# EAGLE board steering_wheel_V3.0 (EAGLE 6.3)
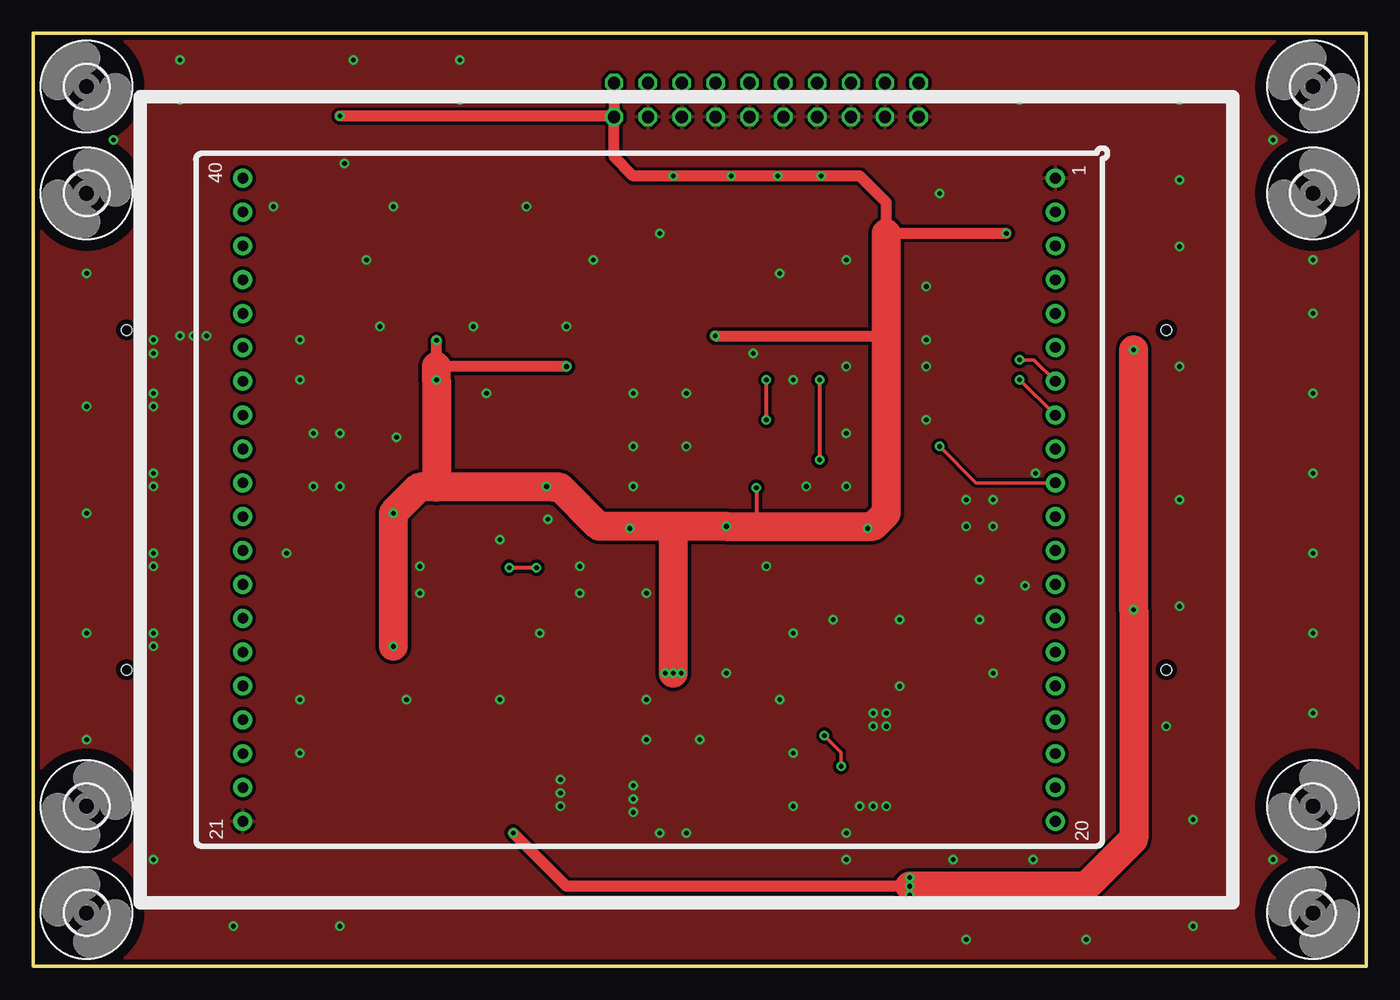
[diagram p0: board, top side]
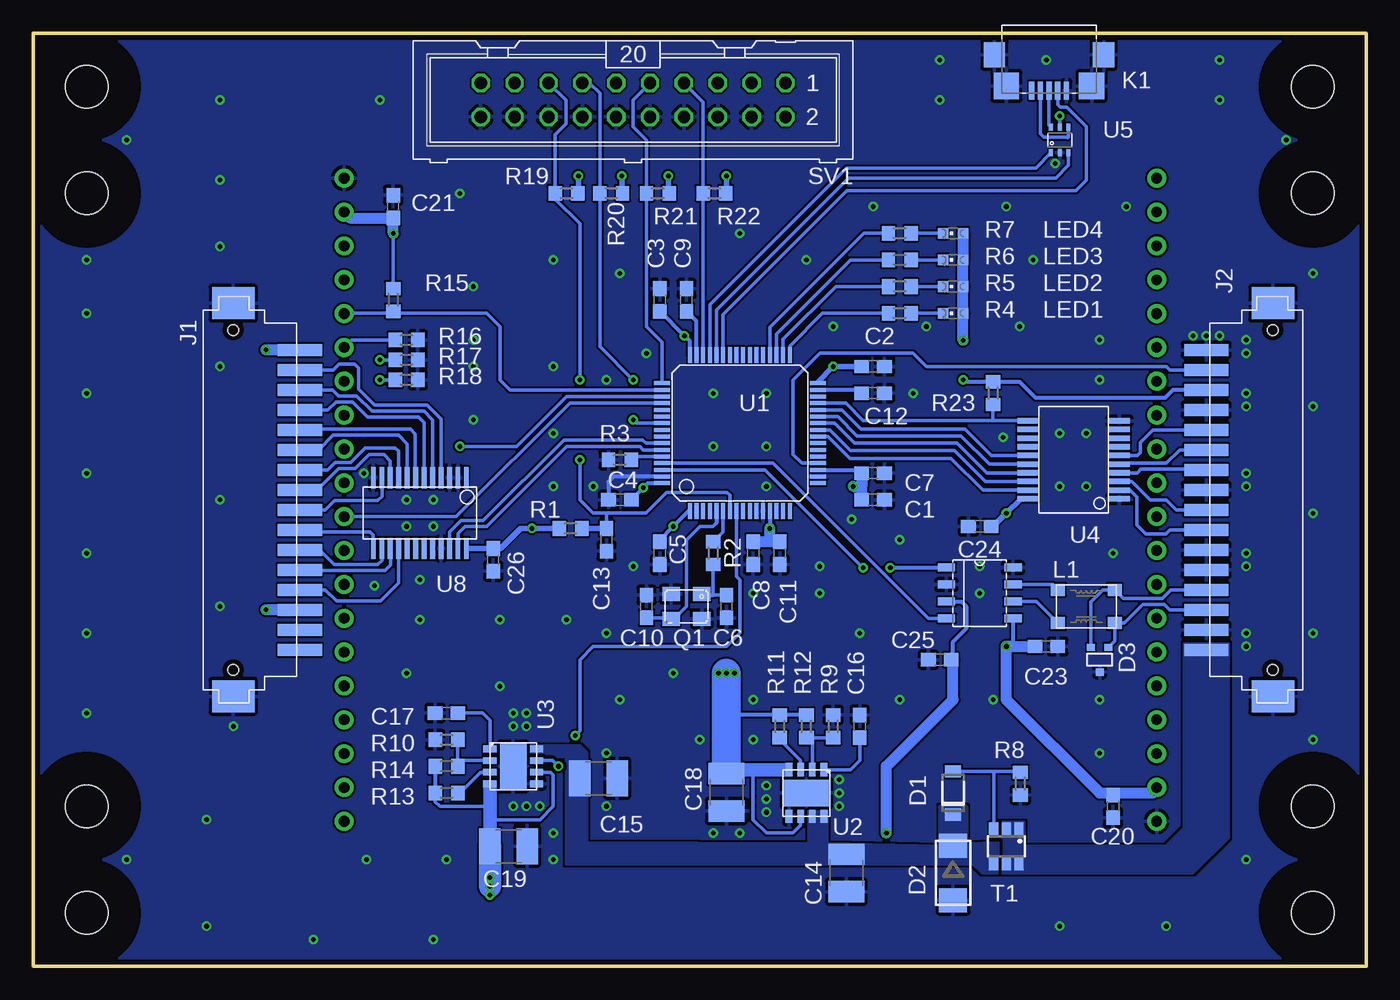
[diagram p1: board, bottom side, seen from below]

Size 100 x 70 mm. Coordinates in mm from the lower left corner, seen from the top.
Outline: 0,70 0,0 100,0 100,70 0,70
Copper layers (1*16): Top 0.0356mm / dielectric 1.5011mm / Bottom 0.0356mm
Design rules "oshPark2Layer *": minimum track width 6mil, minimum drill 13mil, track to track 6mil, track to pad 6mil, pad to pad 6mil, via to via 6mil, smd to smd 6mil, copper to edge 15mil, drill to drill 6mil, minimum pad ring 7mil, minimum via ring 7mil, stop-mask expansion 3mil, vias tented up to drill 0.35mm, thermal gap 10mil
tKeepout: area 9,6 to 89,64

## Footprints (pad centres in the part's own frame; a part is rotated, then mirrored left to right if it is on the bottom)
C0603 = smd 1.1 x 1: 1 -0.85,0; 2 0.85,0
C1210 = smd 1.6 x 2.7: 1 -1.4,0; 2 1.4,0
SOD123F = smd 0.91 x 1.22: A 1.625,0; C -1.625,0
DO214AC = smd 1.8 x 2.1: A 2.05,0; C -2.05,0
SOT-323 = smd 0.6 x 0.55: 1 -0.65,-0.925; 2 0.65,-0.925; 3 0,0.925
EDIPTFT32-A = drill 0.8 pad 1.422: P$1 -24.13,30.48; P$2 -21.59,30.48; P$3 -19.05,30.48; P$4 -16.51,30.48; P$5 -13.97,30.48; P$6 -11.43,30.48; P$7 -8.89,30.48; P$8 -6.35,30.48; P$9 -3.81,30.48; P$10 -1.27,30.48; P$11 1.27,30.48; P$12 3.81,30.48; P$13 6.35,30.48; P$14 8.89,30.48; P$15 11.43,30.48; P$16 13.97,30.48; P$17 16.51,30.48; P$18 19.05,30.48; P$19 21.59,30.48; P$20 24.13,30.48; P$21 24.13,-30.48; P$22 21.59,-30.48; P$23 19.05,-30.48; P$24 16.51,-30.48; P$25 13.97,-30.48; P$26 11.43,-30.48; P$27 8.89,-30.48; P$28 6.35,-30.48; P$29 3.81,-30.48; P$30 1.27,-30.48; P$31 -1.27,-30.48; P$32 -3.81,-30.48; P$33 -6.35,-30.48; P$34 -8.89,-30.48; P$35 -11.43,-30.48; P$36 -13.97,-30.48; P$37 -16.51,-30.48; P$38 -19.05,-30.48; P$39 -21.59,-30.48; P$40 -24.13,-30.48
3,2 = hole 3.2: 0,0
1-292227-6 = smd 0.9 x 3.3: 1 -11.25,5; 2 -9.75,5; 3 -8.25,5; 4 -6.75,5; 5 -5.25,5; 6 -3.75,5; 7 -2.25,5; 8 -0.75,5; 9 0.75,5; 10 2.25,5; 11 3.75,5; 12 5.25,5; 13 6.75,5; 14 8.25,5; 15 9.75,5; 16 11.25,5 | smd 2.4 x 3.2: PAD1 -14.75,0; PAD2 14.75,0 | hole 0.8: 12.75,0; -12.75,0
ZX62R-B = smd 1.35 x 0.4: D+ 2.35,0; D- 2.35,-0.65; GND 2.35,1.3; ID 2.35,0.65; VCC 2.35,-1.3 | smd 2 x 1.9: P$6 2,-3.2; P$8 2,3.2 | smd 1.9 x 1.6: P$7 -0.35,-4.1; P$9 -0.35,4.1
ACT45B = smd 1.05 x 0.9: 1 -2.125,1.25; 2 -2.125,-1.25; 3 2.125,-1.25; 4 2.125,1.25
CHIPLED_0603 = smd 0.8 x 0.8: A 0,-0.75; C 0,0.75
3.2X2.5MM-SMD = smd 1.3 x 1.05: 1 1.15,0.925; 2 -1.15,0.925; 3 -1.15,-0.925; 4 1.15,-0.925
R0603 = smd 1 x 1.1: 1 -0.85,0; 2 0.85,0
ML20 = drill 0.914 octagon: 1 -11.43,-1.27; 2 -11.43,1.27; 3 -8.89,-1.27; 4 -8.89,1.27; 5 -6.35,-1.27; 6 -6.35,1.27; 7 -3.81,-1.27; 8 -3.81,1.27; 9 -1.27,-1.27; 10 -1.27,1.27; 11 1.27,-1.27; 12 1.27,1.27; 13 3.81,-1.27; 14 3.81,1.27; 15 6.35,-1.27; 16 6.35,1.27; 17 8.89,-1.27; 18 8.89,1.27; 19 11.43,-1.27; 20 11.43,1.27
SSOT6 = smd 0.69 x 0.99: 1 -0.95,-1.3; 2 0,-1.3; 3 0.95,-1.3; 4 0.95,1.3; 5 0,1.3; 6 -0.95,1.3
LQFP64 = smd 1.2 x 0.3: 1 -5.85,3.75; 2 -5.85,3.25; 3 -5.85,2.75; 4 -5.85,2.25; 5 -5.85,1.75; 6 -5.85,1.25; 7 -5.85,0.75; 8 -5.85,0.25; 9 -5.85,-0.25; 10 -5.85,-0.75; 11 -5.85,-1.25; 12 -5.85,-1.75; 13 -5.85,-2.25; 14 -5.85,-2.75; 15 -5.85,-3.25; 16 -5.85,-3.75; 33 5.85,-3.75; 34 5.85,-3.25; 35 5.85,-2.75; 36 5.85,-2.25; 37 5.85,-1.75; 38 5.85,-1.25; 39 5.85,-0.75; 40 5.85,-0.25; 41 5.85,0.25; 42 5.85,0.75; 43 5.85,1.25; 44 5.85,1.75; 45 5.85,2.25; 46 5.85,2.75; 47 5.85,3.25; 48 5.85,3.75 | smd 0.3 x 1.2: 17 -3.75,-5.85; 18 -3.25,-5.85; 19 -2.75,-5.85; 20 -2.25,-5.85; 21 -1.75,-5.85; 22 -1.25,-5.85; 23 -0.75,-5.85; 24 -0.25,-5.85; 25 0.25,-5.85; 26 0.75,-5.85; 27 1.25,-5.85; 28 1.75,-5.85; 29 2.25,-5.85; 30 2.75,-5.85; 31 3.25,-5.85; 32 3.75,-5.85; 49 3.75,5.85; 50 3.25,5.85; 51 2.75,5.85; 52 2.25,5.85; 53 1.75,5.85; 54 1.25,5.85; 55 0.75,5.85; 56 0.25,5.85; 57 -0.25,5.85; 58 -0.75,5.85; 59 -1.25,5.85; 60 -1.75,5.85; 61 -2.25,5.85; 62 -2.75,5.85; 63 -3.25,5.85; 64 -3.75,5.85
SIL0008E = smd 1 x 0.5: 1 -1.75,1.312; 2 -1.75,0.438; 3 -1.75,-0.438; 4 -1.75,-1.312; 5 1.75,-1.312; 6 1.75,-0.438; 7 1.75,0.438; 8 1.75,1.312 | smd 2 x 3.5: PAD 0,0
SSOP-20 = smd 0.42 x 1.62: 1 -2.925,-3.425; 2 -2.275,-3.425; 3 -1.625,-3.425; 4 -0.975,-3.425; 5 -0.325,-3.425; 6 0.325,-3.425; 7 0.975,-3.425; 8 1.625,-3.425; 9 2.275,-3.425; 10 2.925,-3.425; 11 2.925,3.425; 12 2.275,3.425; 13 1.625,3.425; 14 0.975,3.425; 15 0.325,3.425; 16 -0.325,3.425; 17 -0.975,3.425; 18 -1.625,3.425; 19 -2.275,3.425; 20 -2.925,3.425
SOT363 = smd 0.3 x 0.5: 1 0.65,0.95; 2 0,0.95; 3 -0.65,0.95; 4 -0.65,-0.95; 5 0,-0.95; 6 0.65,-0.95
SOIC8 = smd 0.6 x 1.3: P1 -1.905,-2.5; P2 -0.635,-2.5; P3 0.635,-2.5; P4 1.905,-2.5; P5 1.905,2.5; P6 0.635,2.5; P7 -0.635,2.5; P8 -1.905,2.5
QSOP-24 = smd 0.36 x 1.6: 1 -3.493,-2.655; 2 -2.857,-2.655; 3 -2.223,-2.655; 4 -1.587,-2.655; 5 -0.953,-2.655; 6 -0.318,-2.655; 7 0.318,-2.655; 8 0.953,-2.655; 9 1.587,-2.655; 10 2.223,-2.655; 11 2.857,-2.655; 12 3.493,-2.655; 13 3.493,2.655; 14 2.857,2.655; 15 2.223,2.655; 16 1.587,2.655; 17 0.953,2.655; 18 0.318,2.655; 19 -0.318,2.655; 20 -0.953,2.655; 21 -1.587,2.655; 22 -2.223,2.655; 23 -2.857,2.655; 24 -3.493,2.655

## Placement (x,y rotation side)
C1  4u7  [C0603]  37,35 0 bottom
C2  100n  [C0603]  37,45 0 bottom
C3  100n  [C0603]  53,50 90 bottom
C4  100n  [C0603]  56,35 180 bottom
C5  100n  [C0603]  53,31 270 bottom
C6  10p  [C0603]  48,27 270 bottom
C7  100n  [C0603]  37,37 0 bottom
C8  1u  [C0603]  46,31 270 bottom
C9  2u2  [C0603]  51,50 90 bottom
C10  10p  [C0603]  54,27 90 bottom
C11  10n  [C0603]  44,31 270 bottom
C12  2u2  [C0603]  37,43 0 bottom
C13  100n  [C0603]  57,32 270 bottom
C14  22u  [C1210]  39,7 270 bottom
C15  22u  [C1210]  57.6,14.1 0 bottom
C16  3n3  [C0603]  38,18 90 bottom
C17  3n3  [C0603]  69,19 180 bottom
C18  22u  [C1210]  48,13.05 270 bottom
C19  22u  [C1210]  64.35,9 0 bottom
C20  100n  [C0603]  19,12 270 bottom
C21  100n  [C0603]  73,57 90 bottom
C23  100n  [C0603]  24,24 180 bottom
C24  100n  [C0603]  29,33 0 bottom
C25  100n  [C0603]  32,23 0 bottom
C26  100n  [C0603]  65.5,30.5 90 bottom
D1  BZT52B18-E3-18  [SOD123F]  31,13 90 bottom
D2  SMA6J33CA-TR  [DO214AC]  31,7 270 bottom
D3  PESD1CAN-U  [SOT-323]  20,23 180 bottom
DISPLAY  EA_EDIPTFT32-A  [EDIPTFT32-A]  46.2,35 270 top
H1  MOUNT-HOLE3.2  [3,2]  4,66 270 top
H2  MOUNT-HOLE3.2  [3,2]  4,4 270 top
H3  MOUNT-HOLE3.2  [3,2]  96,66 270 top
H4  MOUNT-HOLE3.2  [3,2]  96,4 270 top
H5  MOUNT-HOLE3.2  [3,2]  4,58 0 top
H6  MOUNT-HOLE3.2  [3,2]  4,12 0 top
H7  MOUNT-HOLE3.2  [3,2]  96,58 0 top
H8  MOUNT-HOLE3.2  [3,2]  96,12 0 top
J1  1-292227-6  [1-292227-6]  85,35 270 bottom
J2  1-292227-6  [1-292227-6]  7,35 90 bottom
K1  USB-MICROZX62R-B  [ZX62R-B]  23.8,68.05 270 bottom
L1  ACT45B  [ACT45B]  21,27 0 bottom
LED1  [CHIPLED_0603]  31,49 90 bottom
LED2  [CHIPLED_0603]  31,51 90 bottom
LED3  [CHIPLED_0603]  31,53 90 bottom
LED4  [CHIPLED_0603]  31,55 90 bottom
Q1  25 MHz  [3.2X2.5MM-SMD]  51,27 0 bottom
R1  10k  [R0603]  59.7,32.85 0 bottom
R2  390  [R0603]  49,31 270 bottom
R3  4k7  [R0603]  56,38 180 bottom
R4  470  [R0603]  35,49 0 bottom
R5  470  [R0603]  35,51 0 bottom
R6  470  [R0603]  35,53 0 bottom
R7  470  [R0603]  35,55 0 bottom
R8  10k  [R0603]  25.95,13.7 90 bottom
R9  383k  [R0603]  40,18 270 bottom
R10  44.2k  [R0603]  69,17 0 bottom
R11  10k  [R0603]  44,18 90 bottom
R12  1M21  [R0603]  42,18 90 bottom
R13  10k  [R0603]  69,13 180 bottom
R14  232k  [R0603]  69,15 180 bottom
R15  100k  [R0603]  73,50 270 bottom
R16  X(10k)  [R0603]  72,47 180 bottom
R17  X(10k)  [R0603]  72,45.5 180 bottom
R18  X(10k)  [R0603]  72,44 180 bottom
R19  x(10K)  [R0603]  60,58 180 bottom
R20  10K  [R0603]  56.65,58 180 bottom
R21  10K  [R0603]  53.15,58 180 bottom
R22  10K  [R0603]  48.9,58 180 bottom
R23  10k  [R0603]  28,43 90 bottom
SV1  [ML20]  55,65 180 bottom
T1  FDC5614P  [SSOT6]  27,9 180 bottom
U1  STM32F415RG  [LQFP64]  47,40 90 bottom
U2  LMZ21701  [SIL0008E]  42,13 270 bottom
U3  LMZ21701  [SIL0008E]  64,15 0 bottom
U4  MAX6818  [SSOP-20]  21.95,38 90 bottom
U5  NUF2221  [SOT363]  23,62 180 bottom
U6  SN65HVD256  [SOIC8]  29,28 270 bottom
U8  MAX7313AEG+  [QSOP-24]  71,34 180 bottom

## Library data of the parts
C1-C5 C7-C9 C11 C12 C14-C21 C23-C26 R4-R7 R10 R14-R18 R23 = rcl
C6 C10 C13 = rcl; DISTRIBUTOR: Digikey; OC_DIGIKEY: 445-1769-1-ND; ORDER_CODE: 445-1769-1-ND
D1 = usr_diode; DISTRIBUTOR: Mouser; OC_MOUSER: 78-BZT52B18-E3-18; ORDER_CODE: 78-BZT52B18-E3-18
D2 = usr_diode; DISTRIBUTOR: Mouser; OC_MOUSER: 511-SMA6J33CA-TR; ORDER_CODE: 511-SMA6J33CA-TR
D3 = usr_nxp; DISTRIBUTOR: Digikey; OC_DIGIKEY: 568-10731-1-ND; ORDER_CODE: 568-10731-1-ND
DISPLAY = _TUG Racing Team_
H1-H8 = holes
J1 J2 = te; DISTRIBUTOR: Digikey; OC_DIGIKEY: A99782CT-ND; ORDER_CODE: A99782CT-ND
K1 = usr_hirose-electric; DISTRIBUTOR: Digikey; OC_DIGIKEY: H11574CT-ND; ORDER_CODE: H11574CT-ND
L1 = usr_gerneral; DISTRIBUTOR: Digikey; OC_DIGIKEY: 495-4597-2-ND; ORDER_CODE: 495-4597-2-ND
LED1-LED4 = led; ASMT-RA45-AQ502: amber; ASMT-RF45-AQ502: green; ASMT-RJ45-AQ502: orange; ASMT-RR45-AQ502: red
Q1 = usr_crystal; DISTRIBUTOR: Digikey; OC_DIGIKEY: 644-1266-1-ND; ORDER_CODE: 644-1266-1-ND
R1-R3 R9 R11-R13 = rcl; DISTRIBUTOR: Digikey; OC_DIGIKEY: P390AGCT-ND; ORDER_CODE: P390AGCT-ND
R8 R19-R22 = rcl; DISTRIBUTOR: Mouser; OC_MOUSER: 71-CRCW0402-10K-E3; ORDER_CODE: 71-CRCW0402-10K-E3
SV1 = con-ml; OC_FARNELL: unknown; OC_NEWARK: unknown
T1 = usr_gerneral; DISTRIBUTOR: Mouser; OC_MOUSER: 512-FDC5614P; ORDER_CODE: 512-FDC5614P
U1 = STMicroelectronics; DISTRIBUTOR: Digikey; OC_DIGIKEY: 497-11767-ND; ORDER_CODE: 497-11767-ND
U2 U3 = ti; DISTRIBUTOR: RS; ORDER_CODE: 798-1212
U4 U8 = maxim
U5 = usr_on-semiconductor; DISTRIBUTOR: Digikey; OC_DIGIKEY: NUF2221W1T2GOSCT-ND; ORDER_CODE: NUF2221W1T2GOSCT-ND
U6 = usr_TexasInstruments; DISTRIBUTOR: Digikey; OC_DIGIKEY: 296-30093-1-ND; ORDER_CODE: 296-30093-1-ND

## Nets
!MAX_CH: R23.1 U1.29 U4.11
!RESET: C13.1 R1.2 R19.2 SV1.15 U1.7
+3V3: C1.1 C2.1 C3.1 C4.1 C5.1 C7.1 C8.1 C11.1 C18.1 C20.1 C21.1 C23.2 C24.2 C26.2 DISPLAY.P$2 DISPLAY.P$22 J2.14 LED1.A LED2.A LED3.A LED4.A R1.1 R11.2 R12.2 R15.1 R19.1 R20.1 R21.1 R22.1 R23.2 SV1.1 SV1.2 U1.1 U1.13 U1.19 U1.32 U1.48 U1.64 U2.4 U2.6 U4.20 U5.5 U6.P5 U8.24
+5V: C19.1 C25.2 J1.1 J1.14 R13.2 R14.2 U3.4 U3.6 U6.P3
ADC1_IN4: J2.15 U1.20
CAN1_RX: U1.61 U6.P4
CAN1_TX: U1.62 U6.P1
CAN_HIGH: D3.2 J2.4 L1.4
CAN_LOW: D3.1 J2.3 L1.3
DISPLAY_RESET: DISPLAY.P$5 R15.2 U1.50
EN_+5V: U1.8 U3.7
ENTER: J2.12 U4.6
GND: C1.2 C2.2 C3.2 C4.2 C5.2 C6.2 C7.2 C8.2 C9.2 C10.2 C11.2 C12.2 C13.2 C14.2 C15.2 C16.2 C17.2 C18.2 C19.2 C20.2 C21.2 C23.1 C24.1 C25.1 C26.1 D2.A D3.3 DISPLAY.P$1 DISPLAY.P$21 J1.PAD1 J1.PAD2 J2.2 J2.5 J2.6 J2.9 J2.13 J2.16 J2.PAD1 J2.PAD2 K1.GND K1.P$6 K1.P$7 K1.P$8 K1.P$9 Q1.2 Q1.4 R3.2 R8.1 R9.1 R10.1 R16.1 R17.1 R18.1 SV1.4 SV1.6 SV1.8 SV1.10 SV1.12 SV1.14 SV1.16 SV1.18 SV1.20 U1.12 U1.18 U1.63 U2.5 U2.PAD U3.5 U3.PAD U4.1 U4.10 U5.2 U6.P2 U6.P8 U8.2 U8.3 U8.12 U8.21
I2C1_SCL: U1.58 U8.22
I2C1_SDA: U1.59 U8.23
LED_0: R4.1 U1.33
LED_1: R5.1 U1.34
LED_2: R6.1 U1.35
LED_3: R7.1 U1.36
LED_OIL: J1.2 U8.4
LED_RPM0: J1.3 U8.5
LED_RPM1: J1.4 U8.6
LED_RPM2: J1.5 U8.7
LED_RPM3: J1.6 U8.8
LED_RPM4: J1.7 U8.9
LED_RPM5: J1.8 U8.10
LED_RPM6: J1.9 U8.11
LED_RPM7: J1.10 U8.13
LED_RPM8: J1.11 U8.14
LED_RPM9: J1.12 U8.15
LED_WATER: J1.13 U8.16
MAX_ENTER: U1.28 U4.15
MAX_MINUS: U1.25 U4.18
MAX_PLUS: U1.27 U4.16
MAX_SHIFT_DOWN: U1.24 U4.19
MAX_SHIFT_UP: U1.26 U4.17
MINUS: J2.8 U4.3
N$1: C9.1 U1.47
N$2: C12.1 U1.31
N$3: R2.1 U1.6
N$4: C10.1 Q1.3 U1.5
N$5: LED4.C R7.2
N$6: R3.1 U1.60
N$8: DISPLAY.P$8 R18.2
N$10: DISPLAY.P$7 R17.2
N$11: LED2.C R5.2
N$12: LED3.C R6.2
N$13: DISPLAY.P$6 R16.2
N$14: D1.A R8.2 T1.3
N$24: C6.1 Q1.1 R2.2
N$27: LED1.C R4.2
N$38: C16.1 U2.1
N$39: C17.1 U3.1
N$40: R13.1 U3.3
N$41: R11.1 U2.3
N$42: R9.2 R12.1 U2.2
N$43: R10.2 R14.1 U3.2
N$47: L1.1 U6.P7
N$66: L1.2 U6.P6
PLUS: J2.11 U4.5
SHIFT_DOWN: J2.7 U4.2
SHIFT_UP: J2.10 U4.4
SWCLK: R21.2 SV1.9 U1.49
SWDIO: R22.2 SV1.7 U1.46
SWO: R20.2 SV1.13 U1.55
UART4_RX: DISPLAY.P$11 U1.52
UART4_TX: DISPLAY.P$10 U1.51
USB_DM: K1.D- U5.4
USB_DP: K1.D+ U5.6
USB_OTG_FS_DM: U1.44 U5.3
USB_OTG_FS_DP: U1.45 U5.1
USB_OTG_FS_ID: K1.ID U1.43
V_IN: J2.1 T1.1 T1.2 T1.5 T1.6
VCC: C14.1 C15.1 D1.C D2.C T1.4 U2.7 U2.8 U3.8

## Tracks (layer width: path | path; a pad name or v marks a point on that pad's centre or on a via)
!MAX_CH
  Bottom 0.254: U1.29 39.05,42.25 37.75,40.95 28,40.95 | 28,40.95 26.65,40.95 25.4,40.95 U4.11 | R23.1 28,40.95
!RESET  (via drill 0.35)
  Top 0.305: v59,38 v59,44
  Bottom 0.254: U1.7 47.75,35.35 47.95,35.55 52.5,35.55 54.05,34 57,34 | 57,34 58,34 59,35 v59,38 | v59,44 59,55.7 60.85,57.55 | R19.2 60.85,62.4 60.05,63.2 60.05,64.97 SV1.15 | C13.1 57,34
  Bottom 0.305: 60.85,57.55 R19.2
  Bottom 0.406: R1.2 C13.1
+3V3  (via drill 0.35)
  Top 0.305: v62.6,32.85 63.75,34 64,34 | v54.25,35.9 54.25,33 v52,33 | 42.45,33 42.45,32.85 v44.75,32.85
  Top 0.813: v51.15,47.3 63.7,47.3 64,47 | v40,45 30.25,45 v30.25,46.95 | v38.5,36 39,36 39,35.95 | SV1.2 43.57,60.73 45,59.3 v48,59.3 v52.35,59.3 v55.85,59.3 v59.1,59.3 62,59.3 64,57.3 64,55 v73,55 | SV1.1 SV1.2 | SV1.2 43.49,63.65 43.49,63.8 v23,63.8
  Top 2.184: 48,33 v48,22 | 64,55 64,47 64,34 63,33 v52,33 48,33 | 30.25,45 v30.25,44 30.25,35.95 | 30.25,35.95 39,35.95 39.5,35.95 42.45,33 48,33 | 30.25,35.95 28.95,35.95 v27,34 v27,24
  Bottom 0.254: U2.6 42.44,10.56 43,10 45,10 46,11 46,14.75 | U5.5 v23,63.8 | R19.1 59.1,58 | R15.1 v73,55 | 39.9,45 v40,45 | C26.2 64.96,31.35 64.95,31.34 | C24.2 28,33 | 26.09,26.09 26,26
  Bottom 0.305: R12.2 R11.2 47.85,18.85 48,19 | U1.48 50.75,46.9 v51.15,47.3 C3.1 | U1.19 38.1,37.25 C7.1 | C4.1 v54.25,35.9 53.9,36.25 U1.64 | U1.1 50.85,34.15 v52,33 53,32 C5.1 | J2.14 14.5,43.25 15.1,42.65 24.8,42.65 26,43.85 R23.2 30.1,43.85 v30.25,44 | U1.32 41.15,43.85 | U1.13 v44.75,32.85 | 26.09,26.09 U6.P5 26.5,24 | R22.1 48,58 | R21.1 52.35,58 | R20.1 55.85,58 | v47.4,22 v48,22 v48.6,22
  Bottom 0.406: 43.6,14.75 U2.4 | 39.9,45 C2.1 | R1.1 v62.6,32.85 63.45,32.85 64.95,31.34 U8.24 | 41.15,43.85 v40,45 | 28,33 v27,34 25.93,35.08 U4.20 | v48,59.3 48,58 | 52.35,58 v52.35,59.3 | 55.85,58 v55.85,59.3 | 59.1,58 v59.1,59.3
  Bottom 0.813: v38.5,36 38,36 | 38,36 37.85,36 C7.1 | C1.1 37.85,35.95 38,35.95 38,36 | LED4.A LED3.A LED2.A LED1.A v30.25,46.95 | C8.1 C11.1 44.75,31.85 v44.75,32.85 | DISPLAY.P$2 76.24,56.15 C21.1 v73,55 | v27,24 27,20 20,13 19,13 C20.1 18.85,13 16,13 15.72,13.28 DISPLAY.P$22 | v27,24 C23.2 | 26.5,24 v27,24
  Bottom 1.016: 43.6,14.75 46,14.75 48,14.75 C18.1
  Bottom 2.184: 48,14.75 48,19 v48,22
+5V  (via drill 0.35)
  Top 0.813: v36,10 40,6 v65.75,6 66,6
  Top 2.184: v65.75,6 79,6 82.55,9.55 v82.55,26.75 v82.55,46.25
  Bottom 0.254: R13.2 69.85,12.35 69.5,12 65.75,12 | U3.6 61.21,14.56 61,14.35 61,12 62,11 65.75,11 | 65.75,13.4 U3.4 | v65.75,6 v65.75,5.35
  Bottom 0.305: R14.2 R13.2 | U6.P3 30.36,27.36 30,27 30,25.35 31,24.35 31,23 C25.2
  Bottom 0.406: U3.4 65.7,13.64 65.7,13.5
  Bottom 0.813: v36,10 36,15 31,20 31,23 | J1.14 v82.55,26.75 | J1.1 v82.55,46.25
  Bottom 1.016: 65.75,13.4 65.75,12 65.75,11 C19.1
  Bottom 1.676: C19.1 v65.75,6.65 v65.75,6
ADC1_IN4
  Bottom 0.254: J2.15 14.75,44.75 15,45 33,45 34,46 41,46 43,44 43,38.4 42.35,37.75 U1.20
CAN1_RX
  Bottom 0.254: U1.61 44.5,37.75 32.84,26.09 U6.P4
  Bottom 0.305: 32.09,26.09 U6.P4
CAN1_TX  (via drill 0.35)
  Top 0.305: v37.75,29.9 v35.7,29.9
  Bottom 0.254: U1.62 45.1,37.25 v37.75,29.9
  Bottom 0.305: U6.P1 v35.7,29.9
CAN_HIGH
  Bottom 0.254: D3.2 20.65,27.35 19.75,28.25 L1.4 18.23,27.6 15.3,27.6 14.65,28.25 J2.4 14.6,28.25
CAN_LOW
  Bottom 0.254: J2.3 14.75,26.75 15.15,27.15 16.75,27.15 18.15,25.75 L1.3 18.88,24.4 D3.1
DISPLAY_RESET
  Bottom 0.254: DISPLAY.P$5 76.65,49 73,49 66,49 65,48 65,44 64.25,43.25 U1.50
  Bottom 0.305: R15.2 73,49
EN_+5V  (via drill 0.35)
  Top 0.254: v60.6,15 60.6,16.05 v59.35,17.3
  Bottom 0.254: U1.8 47.25,29.25 47,29 47,25 48,24 55,24 58,24 59,23 59,17.65 v59.35,17.3 | U3.7 61.04,15.44 v60.6,15
ENTER
  Bottom 0.254: J2.12 16,40.25 16.95,39.3 16.95,38.55 17.18,38.33 U4.6
GND  (via drill 0.35)
  Bottom 0.254: 56.45,36.75 56.85,36.35
  Bottom 0.305: U1.63 56.45,36.75 | 56.85,36.35 C4.2
  other vias: 11,47.3 12,47.3 13,47.3 58,36 23.35,60.25 45,36 46,28 38.6,33.55 41,30 38,25 20,16 23,3 15,3 9,8 4,17 4,25 4,34 4,42 4,52 6,62 11,65 32,65 74,65 86,65 86,59 86,54 93,62 96,53 96,49 96,43 96,37 96,31 96,25 96,19 93,8 87,11 85,18 87,3 69,8 72,22 57,12 45,43 49,43 61,45 57,44 54,46 67,45 67,47 67,51 68,58 61,53 56,52 47,55 40,48 33,48 26,48 20,47 18,57 23,40 19,31 35,32 55,30 57,25 46,20 56,20 65,26 57,16 46,17 47,10 49,10 61,10 61,8 29,30 29,28 71,29 72,35 34,43 50,17 64,18 63,18 64,19 63,19 39.55,14 39.55,13 39.55,12 28,20 35,20 20,20 45,11.55 45,12.55 45,13.55 63,12 64,12 75,8 70,2 79,2 65,21 32,68 37,57 27,57 71,26 41,28 23,36 75.2,37 70,35 61,40 61,36 20,44 27.25,39.7 74.4,28.55 21,40 21,36 60,26 52,22 42,53 45,39 49,39 25,53 62,12 9,25 9,30 9,31 9,36 9,37 9,42 9,43 9,46 9,47 11,68 24,68 86,27 86,45 86,35 9,24 70,33 72,33 67,41
  pour Top (isolate 0.254): 102,72 102,-2 -2,-2 -2,72
  pour Bottom (rank 6): 101,71 -1,71 -1,-1 101,-1
I2C1_SCL
  Bottom 0.254: U1.58 54.05,39.25 54.3,39.5 60.2,39.5 66.25,33.45 67.9,33.45 68.78,32.57 U8.22
I2C1_SDA
  Bottom 0.254: U1.59 54.25,38.75 54.5,39 60,39 66,33 67.6,33 68.14,32.46 U8.23
LED_0
  Bottom 0.254: U1.33 43.25,46.55 40.8,49 R4.1
LED_1
  Bottom 0.254: R5.1 39.8,51 43.75,47.05 U1.34
LED_2
  Bottom 0.254: U1.35 44.25,47.45 38.7,53 R6.1
LED_3
  Bottom 0.254: U1.36 44.75,47.95 37.7,55 R7.1
LED_OIL
  Bottom 0.254: J1.2 77.5,44.75 77.05,45.2 75.9,45.2 75.6,44.9 75.6,43.3 74.4,42.1 70.45,42.1 69.4,41.05 U8.4
LED_RPM0
  Bottom 0.254: J1.3 77.55,43.25 77.1,42.8 75.75,42.8 74.6,41.65 70.7,41.65 70.05,41 U8.5
LED_RPM1
  Bottom 0.254: J1.4 77.9,41.75 77.3,42.35 76.05,42.35 74.9,41.2 71.1,41.2 70.68,40.78 U8.6
LED_RPM2
  Bottom 0.254: U8.7 71.35,36.69 71.35,39.95 71.7,40.3 79.95,40.3 J1.5
LED_RPM3
  Bottom 0.254: U8.8 71.95,39.2 72.6,39.85 77.5,39.85 78.6,38.75 J1.6
LED_RPM4
  Bottom 0.254: J1.7 77.9,37.25 77.35,37.8 76.2,37.8 75.1,38.9 72.85,38.9 72.6,38.65 U8.9
LED_RPM5
  Bottom 0.254: J1.8 78.7,35.75 77.1,37.35 75.85,37.35 74.8,38.4 73.7,38.4 73.22,37.92 U8.10 73.25,36.68
LED_RPM6
  Bottom 0.254: J1.9 78.1,34.25 77.4,34.95 74.15,34.95 73.85,35.25 73.85,36.65 U8.11
LED_RPM7
  Bottom 0.254: J1.10 79.2,32.75 79.05,32.6 74.75,32.6 74.5,32.35 74.5,31.35 U8.13
LED_RPM8
  Bottom 0.254: J1.11 78.5,31.25 78.5,31.2 77.45,30.15 74.15,30.15 73.85,30.45 U8.14
LED_RPM9
  Bottom 0.254: U8.15 73.2,31.32 73.2,30.1 73.6,29.7 79.95,29.7 J1.12
LED_WATER
  Bottom 0.254: J1.13 78.1,28.25 77.25,27.4 73.95,27.4 72.59,28.76 U8.16
MAX_ENTER
  Bottom 0.254: U1.28 39.35,41.75 37.9,40.3 30.1,40.3 28.12,38.33 U4.15
MAX_MINUS
  Bottom 0.254: U1.25 40.25,40.25 38.7,38.7 30.9,38.7 28.57,36.38 U4.18
MAX_PLUS
  Bottom 0.254: U1.27 39.65,41.25 38.2,39.8 30.4,39.8 28.27,37.67 U4.16
MAX_SHIFT_DOWN
  Bottom 0.254: U1.24 40.4,39.75 38.75,38.1 31.15,38.1 28.77,35.73 U4.19
MAX_SHIFT_UP
  Bottom 0.254: U1.26 39.9,40.75 38.4,39.25 30.7,39.25 28.48,37.02 U4.17
MINUS
  Bottom 0.254: J2.8 14.25,34.25 15,35 16.2,35 17.57,36.38 U4.3
N$1
  Bottom 0.305: U1.47 50.25,48.4 C9.1
N$2
  Bottom 0.305: C12.1 38.1,43.25 U1.31
N$3
  Bottom 0.254: U1.6 48.25,32.6 R2.1
N$4
  Bottom 0.254: 48.75,33.25 49,33 50,33 51,32 51,27 51.92,26.07 | 52.23,26.15 C10.1
  Bottom 0.305: U1.5 48.75,33.25 | 51.92,26.07 Q1.3 52.23,26.15
N$5
  Bottom 0.254: R7.2 LED4.C
N$6
  Bottom 0.254: U1.60 54.9,38.25 R3.1
N$8  (via drill 0.35)
  Top 0.254: DISPLAY.P$8 74.03,44 v74,44
  Bottom 0.254: v74,44 R18.2
N$10  (via drill 0.35)
  Top 0.254: DISPLAY.P$7 75.07,45.5 v74,45.5
  Bottom 0.254: v74,45.5 R17.2
N$11
  Bottom 0.254: R5.2 LED2.C
N$12
  Bottom 0.254: R6.2 LED3.C
N$13
  Bottom 0.254: DISPLAY.P$6 76.11,47 R16.2
N$14
  Bottom 0.254: T1.3 27.95,14.62 | 27.95,14.62 D1.A | 25.95,14.62 27.95,14.62
  Bottom 0.406: R8.2 25.95,14.62
N$24
  Bottom 0.254: Q1.1 49.77,27.85 | C6.1 49,27.85 R2.2
  Bottom 0.305: 49.77,27.85 49,27.85
N$27
  Bottom 0.254: R4.2 LED1.C
N$38
  Bottom 0.254: U2.1 38.7,14.75 38,15.45 C16.1
N$39
  Bottom 0.254: U3.1 65.75,18.45 66.3,19 C17.1
N$40
  Bottom 0.254: U3.3 66.44,14.56 68,13
  Bottom 0.305: 68,13 R13.1
N$41
  Bottom 0.254: U2.3 42.44,15.44 44,17
  Bottom 0.305: 44,17 R11.1
N$42
  Bottom 0.254: U2.2 41.56,17.15 | R12.1 R9.2
  Bottom 0.305: 41.56,17.15 R12.1
N$43
  Bottom 0.254: U3.2 68.15,15.44 | R14.1 R10.2
  Bottom 0.305: 68.15,15.44 R14.1
N$47
  Bottom 0.254: U6.P7 23.51,28.64 L1.1
N$66
  Bottom 0.254: U6.P6 24.74,27.36 L1.2
PLUS
  Bottom 0.254: J2.11 14,38.75 15,37.75 18.45,37.75 U4.5
SHIFT_DOWN
  Bottom 0.254: J2.7 14.75,32.75 15.05,32.45 16.55,32.45 17.2,33.1 17.2,35.2 17.73,35.73 U4.2
SHIFT_UP
  Bottom 0.254: J2.10 13.15,37.25 13.2,37.3 16.9,37.3 17.18,37.02 U4.4
SWCLK
  Bottom 0.254: U1.49 52.85,46.85 54,48 R21.2 54,61.8 54,62 55,63 55,65 SV1.9
SWDIO
  Bottom 0.254: U1.46 R22.2 49.75,64.83 SV1.7
SWO  (via drill 0.35)
  Top 0.305: v55,41 v55,44
  Bottom 0.254: U1.55 54.75,40.75 v55,41 | v55,44 57.5,46.5 R20.2 57.5,65.5 58.27,66.27 SV1.13
UART4_RX
  Bottom 0.254: U1.52 59.75,42.25 68.27,33.73 DISPLAY.P$11
UART4_TX  (via drill 0.35)
  Top 0.254: DISPLAY.P$10 70.73,36.27 v68,39
  Bottom 0.254: U1.51 60,42.75 63.75,39 v68,39
USB_DM
  Bottom 0.254: U5.4 22.35,62.25 | 22.4,62.2 24.2,62.2 24.45,62.45 K1.D-
  Bottom 0.305: 22.35,62.25 22.4,62.2
USB_DP
  Bottom 0.254: K1.D+ 23.8,63.1 U5.6
USB_OTG_FS_DM
  Bottom 0.254: U1.44 48.75,49.25 38.85,59.15 23.3,59.15 22.35,60.1 U5.3
USB_OTG_FS_DP
  Bottom 0.254: U1.45 49.25,49.65 39,59.9 24.8,59.9 U5.1
USB_OTG_FS_ID
  Bottom 0.254: U1.43 48.25,48.9 38.95,58.2 21.8,58.2 21,59 21,63 22.45,64.45 22.95,64.45 23.15,64.65 K1.ID
V_IN
  pour Bottom (isolate 0.254, rank 2, no thermals): 10.35,24.2 13.65,24.2 13.65,10.35 15,9 25.7,9 25.7,10.8 27.45,10.8 27.5,7 13,7 10.35,9.65
VCC
  pour Bottom (isolate 0.254, no thermals): 62.75,15.75 62.75,16.55 59,16.55 58.5,16.05 58.5,9.25 41.8,9.2 41.8,11.7 40.45,11.7 40.45,9.2 32,9 32,12 30.05,12 30,11.95 30,9.2 27.65,9.25 27.65,7 28.8,7 29.5,7.7 59.95,7.7 60,7.65 60,15.7

## Text on the board
Konstruktion: top